# EAGLE board MSOP8_TSSOP8-DIP (EAGLE 8.5.2)
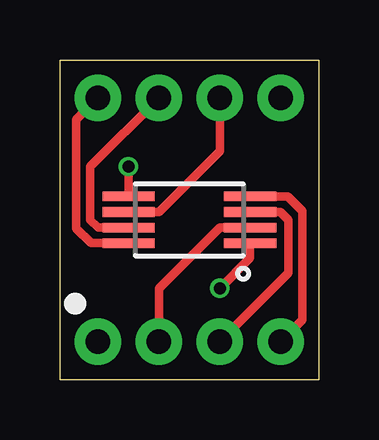
[diagram p0: board, top side]
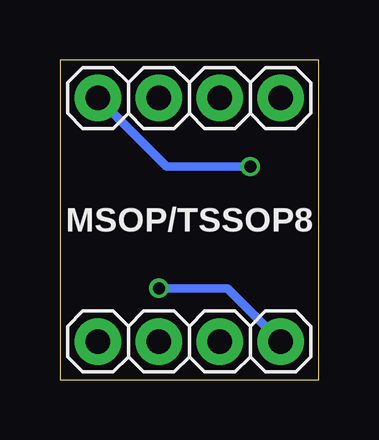
[diagram p1: board, bottom side, seen from below]

Size 10.79 x 13.34 mm. Coordinates in mm from the lower left corner, seen from the top.
Outline: 0,0 0,13.34 10.79,13.34 10.79,0 0,0
Copper layers (1*16): Top 0.035mm / dielectric 1.6mm / Bottom 0.035mm
Design rules "Elecrow_2-layer_PCB_eagle_rule *": minimum track width 6mil, minimum drill 12mil, track to track 6mil, track to pad 6mil, pad to pad 6mil, via to via 8mil, smd to smd 0mil, copper to edge 20mil, drill to drill 10mil, minimum pad ring 18mil, minimum via ring 6mil, stop-mask expansion 0mil, vias tented up to drill 100mil, thermal gap 10mil

## Footprints (pad centres in the part's own frame; a part is rotated, then mirrored left to right if it is on the bottom)
ADAPTER-8 = drill 1.016: 1 1.587,1.587; 2 4.128,1.587; 3 6.668,1.587; 4 9.207,1.587; 5 9.207,11.748; 6 6.668,11.748; 7 4.128,11.748; 8 1.587,11.748
MSOP8-TSSOP8 = smd 0.4 x 2.174: 1 -0.975,-2.538; 2 -0.325,-2.538; 3 0.325,-2.538; 4 0.975,-2.538; 5 0.975,2.538; 6 0.325,2.538; 7 -0.325,2.538; 8 -0.975,2.538

## Placement (x,y rotation side)
MSOP/TSSOP8  ADAPTER-8  [ADAPTER-8]  0,0 0 top
U1  DUMMY8  [MSOP8-TSSOP8]  5.4,6.67 90 top

## Library data of the parts
MSOP/TSSOP8 = my-pinhead
U1 = my-ic

## Nets
N$1: MSOP/TSSOP8.1 U1.1
N$2: MSOP/TSSOP8.2 U1.2
N$3: MSOP/TSSOP8.3 U1.3
N$4: MSOP/TSSOP8.4 U1.4
N$5: MSOP/TSSOP8.5 U1.5
N$6: MSOP/TSSOP8.6 U1.6
N$7: MSOP/TSSOP8.7 U1.7
N$8: MSOP/TSSOP8.8 U1.8

## Tracks (layer width: path | path; a pad name or v marks a point on that pad's centre or on a via)
N$1  (via drill 0.5)
  Top 0.356: U1.1 7.93,5.08 v6.67,3.81
  Bottom 0.356: v6.67,3.81 3.81,3.81 MSOP/TSSOP8.1
N$2
  Top 0.356: MSOP/TSSOP8.2 4.13,3.81 6.67,6.35 7.93,6.35 U1.2
N$3
  Top 0.356: MSOP/TSSOP8.3 9.53,4.45 9.53,6.67 9.21,6.99 U1.3
N$4
  Top 0.356: U1.4 9.5,7.64 10.11,7.04 10.11,2.49 MSOP/TSSOP8.4
N$5  (via drill 0.5)
  Top 0.356: U1.5 v2.86,8.89
  Bottom 0.356: v2.86,8.89 6.35,8.89 MSOP/TSSOP8.5
N$6
  Top 0.356: MSOP/TSSOP8.6 6.67,9.53 4.13,6.99 U1.6
N$7
  Top 0.356: U1.7 1.59,6.34 1.27,6.67 1.27,8.89 MSOP/TSSOP8.7
N$8
  Top 0.356: U1.8 1.29,5.69 0.69,6.3 0.69,10.85 MSOP/TSSOP8.8